# EAGLE board Blinker_03 (EAGLE 6.6.0)
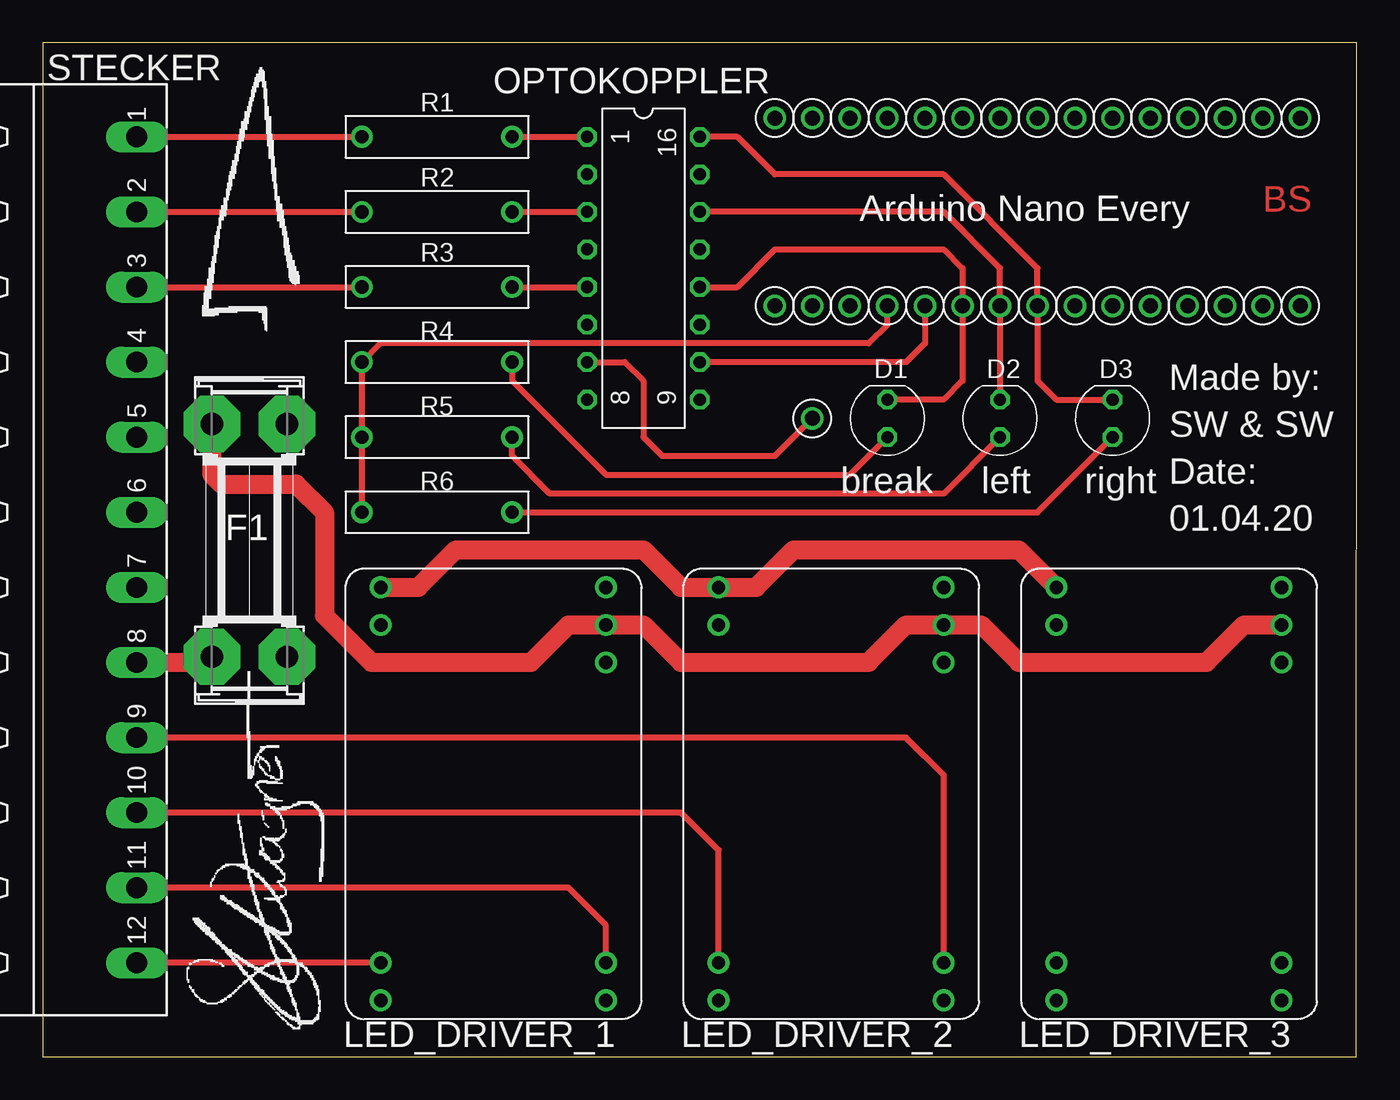
[diagram p0: board, top side]
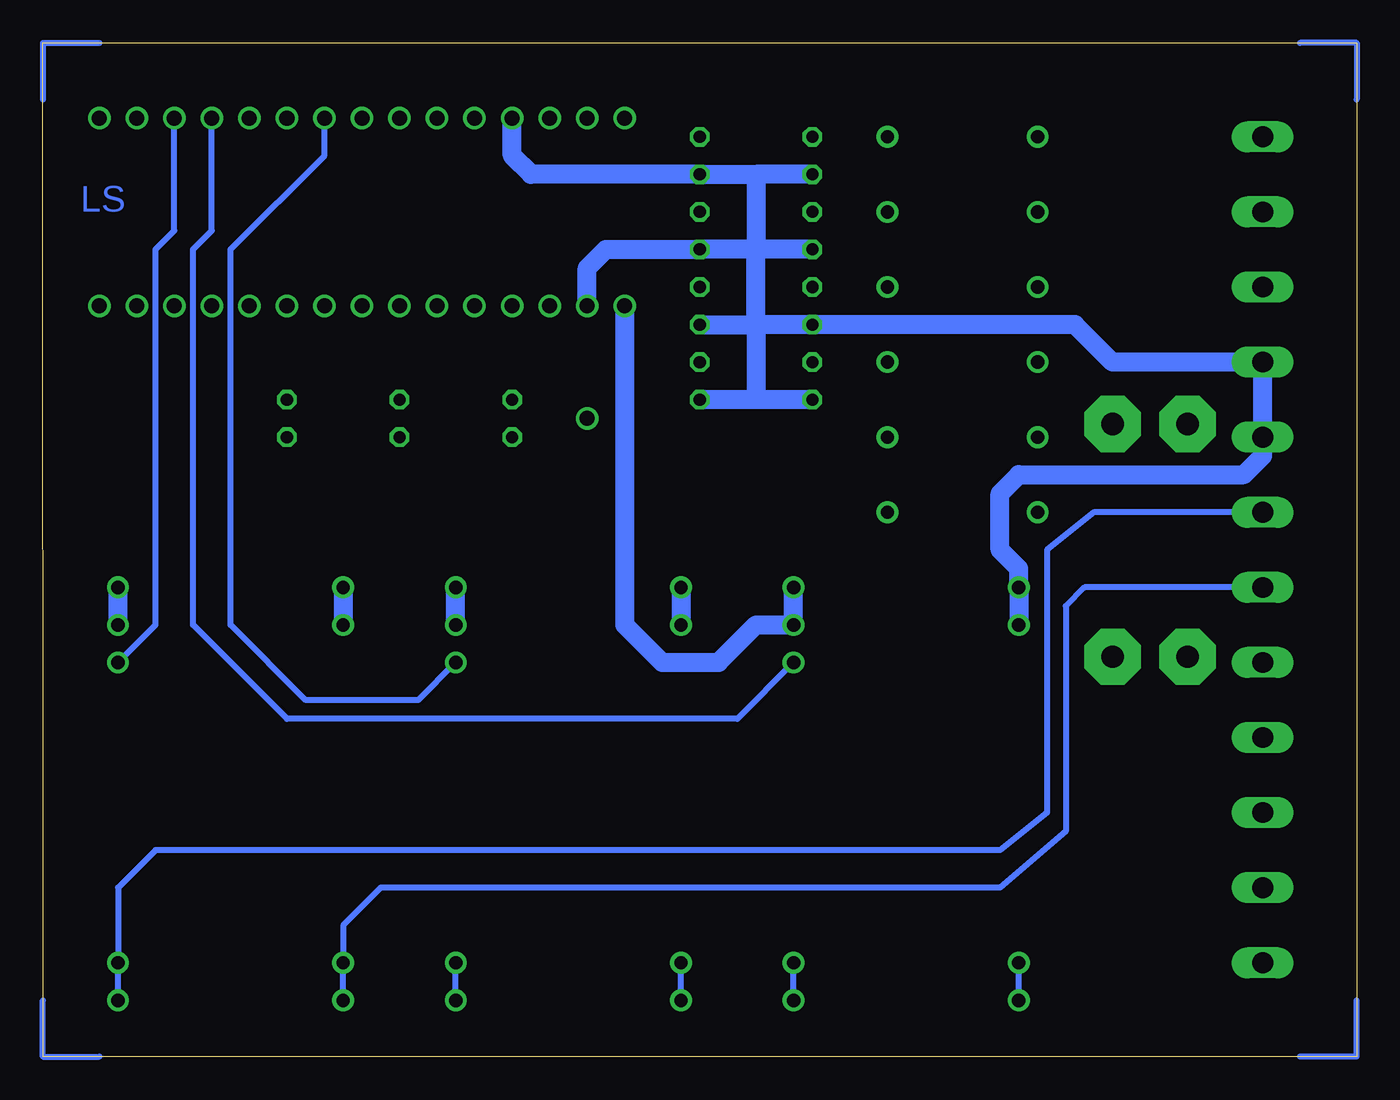
[diagram p1: board, bottom side, seen from below]

Size 88.9 x 68.58 mm. Coordinates in mm from the lower left corner, seen from the top.
Outline: 0,0 88.88,0 88.9,68.58 0,68.58 0,0
Copper layers (1*16): Top 0.035mm / dielectric 1.5mm / Bottom 0.035mm
Design rules "default *": minimum track width 10mil, minimum drill 24mil, track to track 8mil, track to pad 8mil, pad to pad 8mil, via to via 8mil, smd to smd 8mil, copper to edge 40mil, drill to drill 8mil, minimum pad ring 10mil, minimum via ring 8mil, stop-mask expansion 4mil, vias tented up to drill 0mil, thermal gap 10mil

## Footprints (pad centres in the part's own frame; a part is rotated, then mirrored left to right if it is on the bottom)
TP_10 = drill 1.016: P$1 0,0
THT3MM = drill 0.813 octagon: A -1.27,0; K 1.27,0
SHK20Q = drill 1.5 pad 3.81 octagon: 1A -7.874,2.54; 1B -7.874,-2.54; 2A 7.874,2.54; 2B 7.874,-2.54
LDD-H = drill 0.9 pad 1.473: +VIN@1 -12.7,7.62; +VIN@2 -10.16,7.62; +VOUT@1 12.7,7.62; +VOUT@2 15.24,7.62; -VIN@1 -12.7,-7.62; -VIN@2 -10.16,-7.62; -VOUT@1 12.7,-7.62; -VOUT@2 15.24,-7.62; DIMM -7.62,7.62
DIL16 = drill 0.813 octagon: 1 -8.89,-3.81; 2 -6.35,-3.81; 3 -3.81,-3.81; 4 -1.27,-3.81; 5 1.27,-3.81; 6 3.81,-3.81; 7 6.35,-3.81; 8 8.89,-3.81; 9 8.89,3.81; 10 6.35,3.81; 11 3.81,3.81; 12 1.27,3.81; 13 -1.27,3.81; 14 -3.81,3.81; 15 -6.35,3.81; 16 -8.89,3.81
R-10 = drill 0.9 pad 1.473: 1 -5.08,0; 2 5.08,0
MSTBA12 = drill 1.397 long: 1 -27.94,5.08; 2 -22.86,5.08; 3 -17.78,5.08; 4 -12.7,5.08; 5 -7.62,5.08; 6 -2.54,5.08; 7 2.54,5.08; 8 7.62,5.08; 9 12.7,5.08; 10 17.78,5.08; 11 22.86,5.08; 12 27.94,5.08

## Placement (x,y rotation side)
5V  TP_10"  [TP_10]  57.15,50.8 0 top
A4  TP_10"  [TP_10]  67.31,50.8 180 top
A5  TP_10"  [TP_10]  64.77,50.8 180 top
A6  TP_10"  [TP_10]  62.23,50.8 180 top
A7  TP_10"  [TP_10]  59.69,50.8 180 top
D1  THT3MM  [THT3MM]  57.15,43.18 90 top
D2  THT3MM  [THT3MM]  64.77,43.18 90 top
D3  THT3MM  [THT3MM]  72.39,43.18 90 top
D6  TP_10"  [TP_10]  69.85,63.5 0 top
D9  TP_10"  [TP_10]  77.47,63.5 0 top
D10  TP_10"  [TP_10]  80.01,63.5 0 top
F1  1.6A  [SHK20Q]  13.97,34.92 90 top
GND_1  TP_10"  [TP_10]  57.15,63.5 180 top
GND_2  TP_10"  [TP_10]  52.07,50.8 180 top
LED_DRIVER_1  LDD-H  [LDD-H]  30.48,19.05 270 top
LED_DRIVER_2  LDD-H  [LDD-H]  53.34,19.05 270 top
LED_DRIVER_3  LDD-H  [LDD-H]  76.2,19.05 270 top
OPTOKOPPLER  ILQ620  [DIL16]  40.64,53.34 270 top
R1  2,2k  [R-10]  26.67,62.23 0 top
R2  2,2k  [R-10]  26.67,57.15 0 top
R3  2,2k  [R-10]  26.67,52.07 0 top
R4  2,2k  [R-10]  26.67,46.99 180 top
R5  2,2k  [R-10]  26.67,41.91 180 top
R6  2,2k  [R-10]  26.67,36.83 180 top
STECKER  MSTBA12  [MSTBA12]  1.27,34.29 270 top
TESTPUNKT  TP_10"  [TP_10]  52.07,43.18 0 top
U$7  TP_10"  [TP_10]  85.09,63.5 180 top
U$39  TP_10"  [TP_10]  72.39,50.8 0 top
U$40  TP_10"  [TP_10]  54.61,50.8 0 top
U$41  TP_10"  [TP_10]  69.85,50.8 0 top
U$42  TP_10"  [TP_10]  72.39,63.5 0 top
U$43  TP_10"  [TP_10]  74.93,63.5 0 top
U$44  TP_10"  [TP_10]  82.55,63.5 0 top
U$45  TP_10"  [TP_10]  85.09,50.8 0 top
U$46  TP_10"  [TP_10]  82.55,50.8 0 top
U$47  TP_10"  [TP_10]  80.01,50.8 0 top
U$48  TP_10"  [TP_10]  77.47,50.8 0 top
U$49  TP_10"  [TP_10]  74.93,50.8 0 top
U$50  TP_10"  [TP_10]  49.53,63.5 0 top
U$51  TP_10"  [TP_10]  54.61,63.5 0 top
U$52  TP_10"  [TP_10]  59.69,63.5 0 top
U$53  TP_10"  [TP_10]  62.23,63.5 0 top
U$54  TP_10"  [TP_10]  64.77,63.5 0 top
U$55  TP_10"  [TP_10]  67.31,63.5 0 top
U$56  TP_10"  [TP_10]  52.07,63.5 0 top
VIN  TP_10"  [TP_10]  49.53,50.8 180 top

## Library data of the parts
5V A4-A7 D6 D9 D10 GND_1 GND_2 TESTPUNKT U$7 U$39-U$56 VIN = SUPPLY
D1-D3 = LED
F1 = fuse; OC_FARNELL: unknown; OC_NEWARK: unknown
LED_DRIVER_1-LED_DRIVER_3 = SPEZIAL
OPTOKOPPLER = optocoupler
R1-R6 = R-C
STECKER = con-phoenix-508; MPN: 1757349; OC_FARNELL: 3705250; OC_NEWARK: 71C4169

## Nets
+5V: 5V.P$1 R4.2 R5.2 R6.2
+12V: F1.2A LED_DRIVER_1.+VIN@1 LED_DRIVER_1.+VIN@2 LED_DRIVER_2.+VIN@1 LED_DRIVER_2.+VIN@2 LED_DRIVER_3.+VIN@1 LED_DRIVER_3.+VIN@2 VIN.P$1
+VOUT_1: LED_DRIVER_1.+VOUT@1 LED_DRIVER_1.+VOUT@2 STECKER.11
+VOUT_2: LED_DRIVER_2.+VOUT@1 LED_DRIVER_2.+VOUT@2 STECKER.9
+VOUT_3: LED_DRIVER_3.+VOUT@1 LED_DRIVER_3.+VOUT@2 STECKER.6
-VOUT_1: LED_DRIVER_1.-VOUT@1 LED_DRIVER_1.-VOUT@2 STECKER.12
-VOUT_2: LED_DRIVER_2.-VOUT@1 LED_DRIVER_2.-VOUT@2 STECKER.10
-VOUT_3: LED_DRIVER_3.-VOUT@1 LED_DRIVER_3.-VOUT@2 STECKER.7
DIMMER_1: D9.P$1 LED_DRIVER_1.DIMM
DIMMER_2: D6.P$1 LED_DRIVER_2.DIMM
DIMMER_3: D10.P$1 LED_DRIVER_3.DIMM
GND: GND_1.P$1 GND_2.P$1 LED_DRIVER_1.-VIN@1 LED_DRIVER_1.-VIN@2 LED_DRIVER_2.-VIN@1 LED_DRIVER_2.-VIN@2 LED_DRIVER_3.-VIN@1 LED_DRIVER_3.-VIN@2 OPTOKOPPLER.2 OPTOKOPPLER.4 OPTOKOPPLER.6 OPTOKOPPLER.8 OPTOKOPPLER.9 OPTOKOPPLER.11 OPTOKOPPLER.13 OPTOKOPPLER.15 STECKER.4 STECKER.5
LED_1: D1.A R4.1
LED_2: D2.A R5.1
LED_3: D3.A R6.1
N$1: F1.1A STECKER.8
RESERVE_1: OPTOKOPPLER.7 TESTPUNKT.P$1
RESERVE_2: A7.P$1 OPTOKOPPLER.10
SCH_LI_2: OPTOKOPPLER.3 R2.2
SCH_LI_3: A5.P$1 D2.K OPTOKOPPLER.14
SCH_RE_2: OPTOKOPPLER.1 R1.2
SCH_RE_3: A4.P$1 D3.K OPTOKOPPLER.16
SCH_RUE_2: OPTOKOPPLER.5 R3.2
SCH_RUE_3: A6.P$1 D1.K OPTOKOPPLER.12
SCHALTER_LI_1: R2.1 STECKER.2
SCHALTER_RE_1: R1.1 STECKER.1
SCHALTER_RUE_1: R3.1 STECKER.3

## Tracks (layer width: path | path; a pad name or v marks a point on that pad's centre or on a via)
+5V
  Top 0.406: R6.2 R5.2 R4.2 22.86,48.26 55.88,48.26 57.15,49.53 5V.P$1
+12V
  Top 1.27: LED_DRIVER_3.+VIN@2 81.28,29.21 78.74,26.67 66.04,26.67 63.5,29.21 LED_DRIVER_2.+VIN@2 58.42,29.21 55.88,26.67 43.18,26.67 40.64,29.21 LED_DRIVER_1.+VIN@2 35.56,29.21 33.02,26.67 22.23,26.67 19.05,29.84 19.05,36.83 17.15,38.73 12.07,38.73 11.43,39.37 F1.2A
  Bottom 1.27: LED_DRIVER_1.+VIN@1 LED_DRIVER_1.+VIN@2 40.64,29.21 43.18,26.67 46.99,26.67 49.53,29.21 VIN.P$1 | LED_DRIVER_2.+VIN@2 LED_DRIVER_2.+VIN@1 | LED_DRIVER_3.+VIN@2 LED_DRIVER_3.+VIN@1
+VOUT_1
  Top 0.406: LED_DRIVER_1.+VOUT@1 38.1,8.89 35.56,11.43 STECKER.11
  Bottom 0.406: LED_DRIVER_1.+VOUT@2 LED_DRIVER_1.+VOUT@1
+VOUT_2
  Top 0.406: LED_DRIVER_2.+VOUT@1 60.96,19.05 58.42,21.59 STECKER.9
  Bottom 0.406: LED_DRIVER_2.+VOUT@2 LED_DRIVER_2.+VOUT@1
+VOUT_3
  Bottom 0.406: LED_DRIVER_3.+VOUT@2 LED_DRIVER_3.+VOUT@1 83.82,11.43 81.28,13.97 24.13,13.97 20.95,16.51 20.95,34.29 17.78,36.83 STECKER.6
-VOUT_1
  Top 0.406: LED_DRIVER_1.-VOUT@1 STECKER.12
  Bottom 0.406: LED_DRIVER_1.-VOUT@2 LED_DRIVER_1.-VOUT@1
-VOUT_2
  Top 0.406: LED_DRIVER_2.-VOUT@1 45.72,13.97 43.18,16.51 STECKER.10
  Bottom 0.406: LED_DRIVER_2.-VOUT@2 LED_DRIVER_2.-VOUT@1
-VOUT_3
  Bottom 0.406: LED_DRIVER_3.-VOUT@2 LED_DRIVER_3.-VOUT@1 68.58,8.89 66.04,11.43 24.13,11.43 19.69,15.24 19.69,30.48 18.41,31.75 STECKER.7
DIMMER_1
  Bottom 0.406: LED_DRIVER_1.DIMM 41.91,22.86 72.39,22.86 78.74,29.21 78.74,54.61 77.47,55.88 D9.P$1
DIMMER_2
  Bottom 0.406: LED_DRIVER_2.DIMM 63.5,24.13 71.12,24.13 76.2,29.21 76.2,54.61 69.85,60.96 D6.P$1
DIMMER_3
  Bottom 0.406: LED_DRIVER_3.DIMM 81.28,29.21 81.28,54.61 80.01,55.88 D10.P$1
GND
  Top 1.27: LED_DRIVER_3.-VIN@1 66.04,34.29 50.8,34.29 48.26,31.75 LED_DRIVER_2.-VIN@1 43.18,31.75 40.64,34.29 27.94,34.29 25.4,31.75 LED_DRIVER_1.-VIN@1
  Bottom 1.27: 40.64,59.69 OPTOKOPPLER.15 55.88,59.69 57.15,60.96 GND_1.P$1 | 40.64,59.69 40.64,54.61 | 40.64,54.61 OPTOKOPPLER.13 50.8,54.61 52.07,53.34 GND_2.P$1 | OPTOKOPPLER.11 40.64,49.53 | 40.64,49.53 40.64,54.61 | OPTOKOPPLER.2 40.64,59.69 | 40.64,49.53 OPTOKOPPLER.6 19.05,49.53 16.51,46.99 STECKER.4 STECKER.5 6.35,40.64 7.62,39.37 22.86,39.37 24.13,38.1 24.13,34.29 22.86,33.02 LED_DRIVER_1.-VIN@1 LED_DRIVER_1.-VIN@2 | 40.64,49.53 40.64,44.45 | 40.64,44.45 OPTOKOPPLER.9 | OPTOKOPPLER.8 40.64,44.45 | OPTOKOPPLER.4 40.64,54.61 | LED_DRIVER_2.-VIN@1 LED_DRIVER_2.-VIN@2 | LED_DRIVER_3.-VIN@1 LED_DRIVER_3.-VIN@2
LED_1
  Top 0.406: R4.1 31.75,45.72 | 31.75,45.72 38.1,39.37 | 38.1,39.37 54.61,39.37 D1.A | 31.75,45.72 38.1,39.37 | 31.75,45.72 38.1,39.37
LED_2
  Top 0.406: D2.A 60.96,38.1 34.29,38.1 31.75,40.64 R5.1
LED_3
  Top 0.406: R6.1 67.31,36.83 D3.A
N$1
  Top 1.27: STECKER.8 11.05,26.67 F1.1A
N$2
  Bottom 0.406: 88.9,3.81 88.9,0 85.09,0
N$3
  Bottom 0.406: 85.09,68.58 88.9,68.58 88.9,64.77
N$4
  Bottom 0.406: 3.81,68.58 0,68.58 0,64.77
N$5
  Bottom 0.406: 3.81,0 0,0 0,3.81
RESERVE_1
  Top 0.406: TESTPUNKT.P$1 49.53,40.64 41.91,40.64 40.64,41.91 40.64,45.72 39.37,46.99 OPTOKOPPLER.7
RESERVE_2
  Top 0.406: A7.P$1 59.69,48.26 58.42,46.99 OPTOKOPPLER.10
SCH_LI_2
  Top 0.406: R2.2 OPTOKOPPLER.3
SCH_LI_3
  Top 0.406: D2.K A5.P$1 64.77,53.34 60.96,57.15 OPTOKOPPLER.14
SCH_RE_2
  Top 0.406: R1.2 OPTOKOPPLER.1
SCH_RE_3
  Top 0.406: D3.K 68.58,44.45 67.31,45.72 A4.P$1 67.31,53.34 60.96,59.69 49.53,59.69 46.99,62.23 OPTOKOPPLER.16
SCH_RUE_2
  Top 0.406: R3.2 OPTOKOPPLER.5
SCH_RUE_3
  Top 0.406: D1.K 60.96,44.45 62.23,45.72 A6.P$1 62.23,53.34 60.96,54.61 49.53,54.61 46.99,52.07 OPTOKOPPLER.12
SCHALTER_LI_1
  Top 0.406: STECKER.2 R2.1
SCHALTER_RE_1
  Top 0.406: STECKER.1 R1.1
SCHALTER_RUE_1
  Top 0.406: STECKER.3 R3.1

## Text on the board
Top: BS
Bottom: LS
tPlace: Arduino Nano Every | Made by: | SW & SW | Date: | break | left | right | 01.04.20